# EAGLE board ESD0P4RFL (EAGLE 6.2)
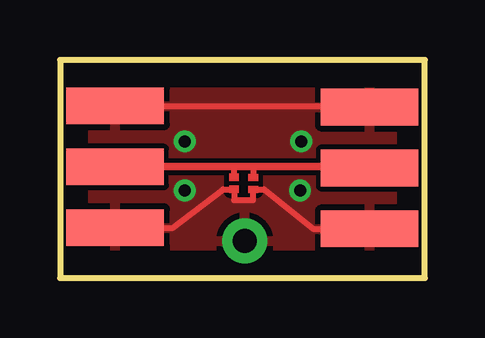
[diagram p0: board, top side]
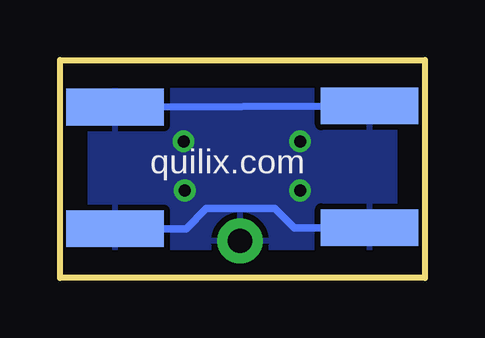
[diagram p1: board, bottom side, seen from below]

Size 15.2 x 9.1 mm. Coordinates in mm from the lower left corner, seen from the top.
Outline: 0,0 15.2,0 15.2,9.1 0,9.1 0,0
Copper layers (1*16): Top 0.035mm / dielectric 1.5mm / Bottom 0.035mm
Design rules: minimum track width 10mil, minimum drill 24mil, track to track 8mil, track to pad 8mil, pad to pad 8mil, via to via 8mil, smd to smd 8mil, copper to edge 40mil, drill to drill 8mil, minimum pad ring 10mil, minimum via ring 8mil, stop-mask expansion 4mil, vias tented up to drill 0mil, thermal gap 10mil

## Footprints (pad centres in the part's own frame; a part is rotated, then mirrored left to right if it is on the bottom)
SMA-EDGE = smd 1.524 x 4.064: GND@0 0,0; GND@1 5.08,0; SIG 2.54,0 | smd 1.524 x 4.064 bottom: GND@2 0,0; GND@3 5.08,0
1X01NS = drill 1.016 pad 1.88: 1 0,0

## Placement (x,y rotation side)
E$1  [SMA-EDGE]  2.3,2.1 90 top
E$2  [SMA-EDGE]  12.9,2.05 90 top
GND  [1X01NS]  7.7,1.55 0 top

## Library data of the parts
E$1 E$2 GND = SparkFun

## Nets
ANT: E$1.SIG E$2.SIG
GND: E$1.GND@0 E$1.GND@1 E$1.GND@2 E$1.GND@3 E$2.GND@0 E$2.GND@1 E$2.GND@2 E$2.GND@3 GND.1

## Tracks (layer width: path | path; a pad name or v marks a point on that pad's centre or on a via)
ANT
  Top 0.254: 8.05,4.65 8.05,4.25 | E$1.SIG | 12.91,4.64 E$2.SIG 11.01,4.59 10.95,4.65 | 7.25,4.25 7.25,4.65
  Top 0.305: E$1.SIG 7.25,4.65 8.05,4.65 10.95,4.65
GND  (via drill 0.5)
  Top 0.254: E$1.GND@3 12.9,7.18 E$2.GND@3 | E$2.GND@2 10.55,2.05 8.5,3.7 8.05,3.7 8.05,3.25 7.25,3.25 7.25,3.7 6.8,3.7 4.7,2.1 E$1.GND@2
  Bottom 0.305: E$1.GND@2 5.45,2.1 6.25,2.9 9.1,2.9 9.95,2.05 E$2.GND@2 | E$1.GND@3 E$2.GND@3
  other vias: 5.2,5.7 10.05,5.7 5.2,3.65 10,3.65
  pour Top: 0.4,0.35 14.85,0.35 14.85,8.75 0.4,8.8
  pour Bottom: 0.25,0.25 14.9,0.25 14.9,8.85 0.25,8.85
(copper drawn outside any net)
  shapes: Top area x4

## Text on the board
_bsilk: quilix.com